# EAGLE board unoplus (EAGLE 9.6.2)
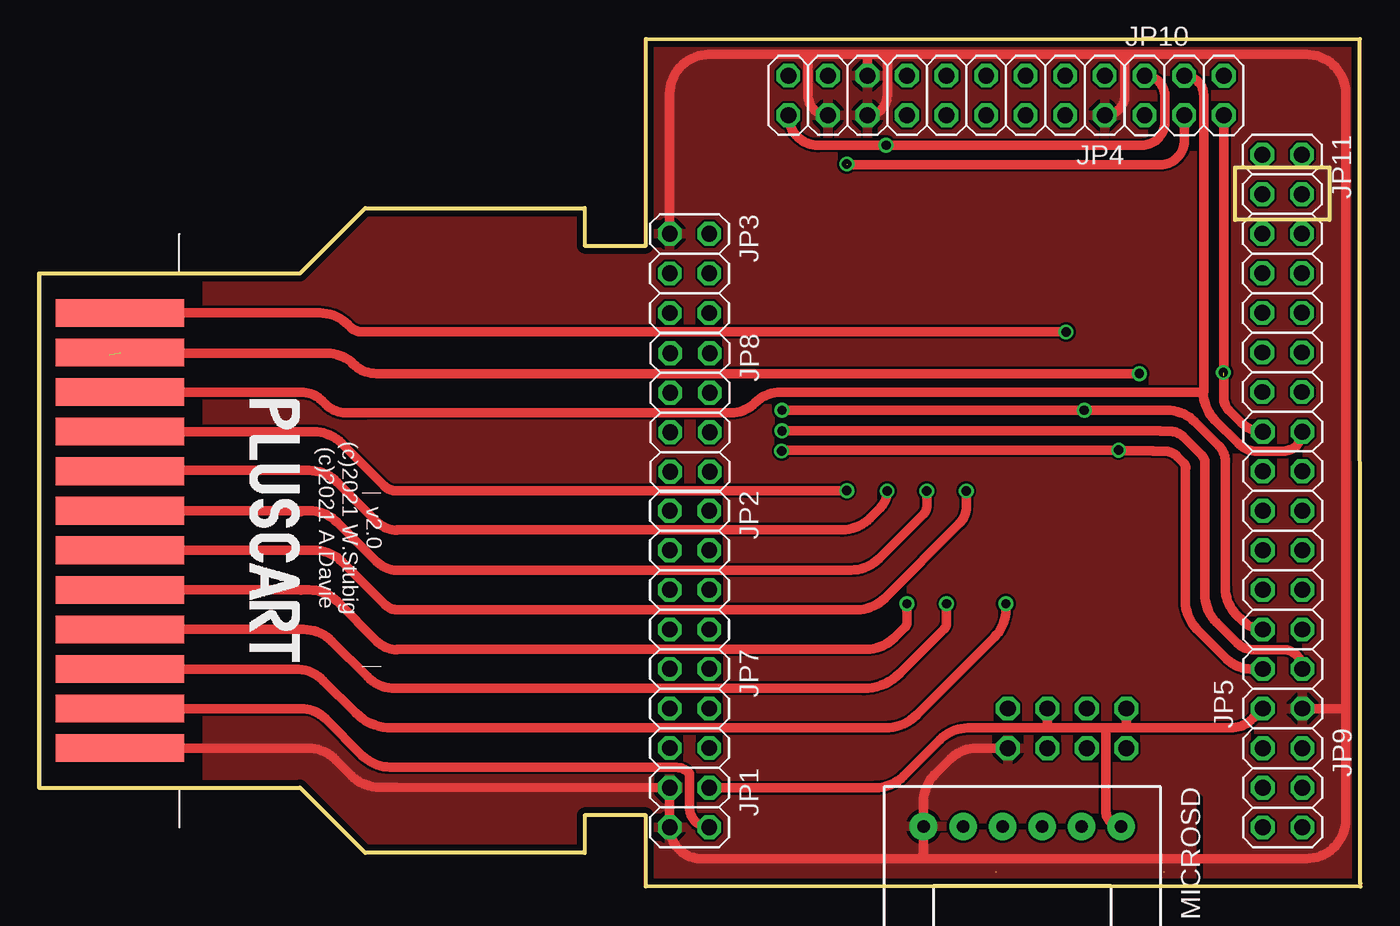
[diagram p0: board, top side]
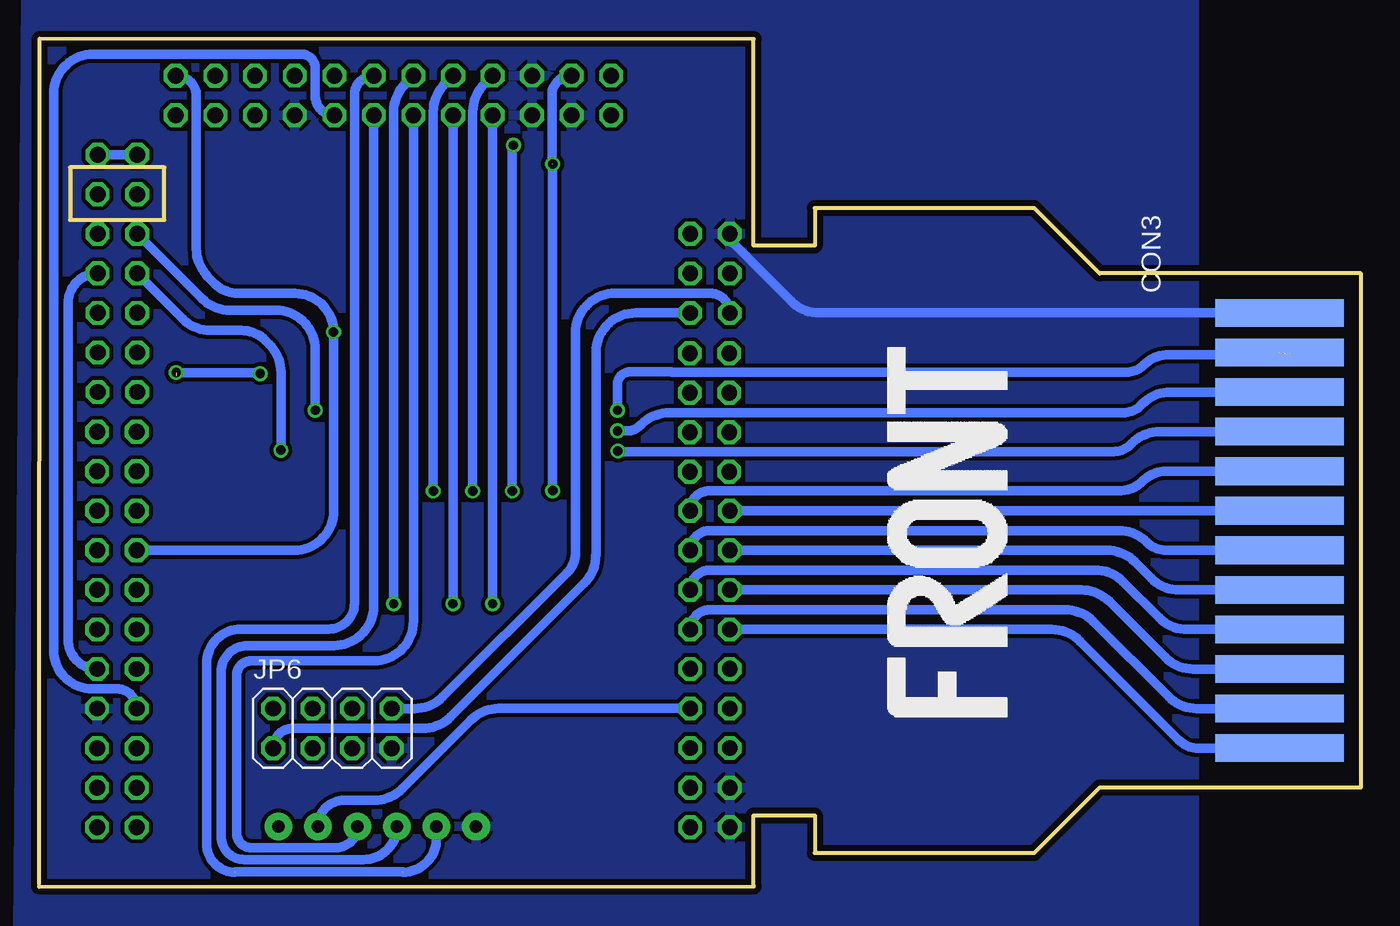
[diagram p1: board, bottom side, seen from below]

Size 84.89 x 54.42 mm. Coordinates in mm from the lower left corner, seen from the top.
Outline: 38.99,54.41 84.85,54.42
Outline: 38.99,41.15 35.05,41.15 35.05,43.56 20.95,43.56 16.76,39.37 0,39.37 0,6.35 16.76,6.35 20.95,2.16 35.05,2.16 35.05,4.57 38.99,4.57 38.99,0.01
Outline: 84.88,0.19 84.84,54.42
Outline: 38.98,41.15 38.98,54.41
Outline: 84.89,0 38.96,0.02
Copper layers (1*16): Top 0.0356mm / dielectric 1.5011mm / Bottom 0.0356mm
Design rules "OSHPark2layer": minimum track width 6mil, minimum drill 13mil, track to track 6mil, track to pad 6mil, pad to pad 6mil, via to via 6mil, smd to smd 6mil, copper to edge 15mil, drill to drill 6mil, minimum pad ring 7mil, minimum via ring 7mil, stop-mask expansion 3mil, vias tented up to drill 0mil, thermal gap 10mil
tRestrict: area 74.5,-0.8 to 74.5,5.7
Milling: 4 lines

## Footprints (pad centres in the part's own frame; a part is rotated, then mirrored left to right if it is on the bottom)
24PINEDGE-254MM = smd 1.778 x 8.255: 1-A -22.86,-7.62; 2-A -20.32,-7.62; 3-A -17.78,-7.62; 4-A -15.24,-7.62; 5-A -12.7,-7.62; 6-A -10.16,-7.62; 7-A -7.62,-7.62; 8-A -5.08,-7.62; 9-A -2.54,-7.62; 10-A 0,-7.62; 11-A 2.54,-7.62; 12-A 5.08,-7.62 | smd 1.778 x 8.255 bottom: 1-B -22.86,-7.62; 2-B -20.32,-7.62; 3-B -17.78,-7.62; 4-B -15.24,-7.62; 5-B -12.7,-7.62; 6-B -10.16,-7.62; 7-B -7.62,-7.62; 8-B -5.08,-7.62; 9-B -2.54,-7.62; 10-B 0,-7.62; 11-B 2.54,-7.62; 12-B 5.08,-7.62
2X02 = drill 1.016 octagon: 1 -1.27,-1.27; 2 -1.27,1.27; 3 1.27,-1.27; 4 1.27,1.27
2X04 = drill 1.016 octagon: 1 -3.81,-1.27; 2 -3.81,1.27; 3 -1.27,-1.27; 4 -1.27,1.27; 5 1.27,-1.27; 6 1.27,1.27; 7 3.81,-1.27; 8 3.81,1.27
2X03 = drill 1.016 octagon: 1 -2.54,-1.27; 2 -2.54,1.27; 3 0,-1.27; 4 0,1.27; 5 2.54,-1.27; 6 2.54,1.27
2X09 = drill 1.016 octagon: 1 -10.16,-1.27; 2 -10.16,1.27; 3 -7.62,-1.27; 4 -7.62,1.27; 5 -5.08,-1.27; 6 -5.08,1.27; 7 -2.54,-1.27; 8 -2.54,1.27; 9 0,-1.27; 10 0,1.27; 11 2.54,-1.27; 12 2.54,1.27; 13 5.08,-1.27; 14 5.08,1.27; 15 7.62,-1.27; 16 7.62,1.27; 17 10.16,-1.27; 18 10.16,1.27
2X08 = drill 1.016 octagon: 1 -8.89,-1.27; 2 -8.89,1.27; 3 -6.35,-1.27; 4 -6.35,1.27; 5 -3.81,-1.27; 6 -3.81,1.27; 7 -1.27,-1.27; 8 -1.27,1.27; 9 1.27,-1.27; 10 1.27,1.27; 11 3.81,-1.27; 12 3.81,1.27; 13 6.35,-1.27; 14 6.35,1.27; 15 8.89,-1.27; 16 8.89,1.27
2X07 = drill 1.016 octagon: 1 -7.62,-1.27; 2 -7.62,1.27; 3 -5.08,-1.27; 4 -5.08,1.27; 5 -2.54,-1.27; 6 -2.54,1.27; 7 0,-1.27; 8 0,1.27; 9 2.54,-1.27; 10 2.54,1.27; 11 5.08,-1.27; 12 5.08,1.27; 13 7.62,-1.27; 14 7.62,1.27
MICROSD_FOOTPRINT = drill 0.8 pad 1.778: 3V3 -13.97,6.35; CLK -13.97,-1.27; CS -13.97,3.81; GND -13.97,-6.35; MISO -13.97,-3.81; MOSI -13.97,1.27

## Placement (x,y rotation side)
CON3  A2600  [24PINEDGE-254MM]  12.83,31.75 90 bottom
JP1  0  [2X02]  41.78,5.08 270 top
JP2  0  [2X04]  41.78,20.32 270 top
JP3  0  [2X03]  41.78,39.37 270 top
JP4  0  [2X09]  58.29,50.8 180 top
JP5  0  [2X08]  79.88,20.32 90 top
JP6  0  [2X04]  66.04,10.16 0 bottom
JP7  0  [2X03]  41.78,11.44 270 top
JP8  0  [2X04]  41.82,30.44 270 top
JP9  0  [2X03]  79.88,6.34 270 top
JP10  0  [2X03]  73.56,50.79 0 top
JP11  0  [2X07]  79.85,39.37 270 top
MICROSD  MICROSD2MICROSD2  [MICROSD_FOOTPRINT]  63.16,-10.11 270 top

## Library data of the parts
CON3 = con-edge
JP1-JP11 = pinhead
MICROSD = MICROSD

## Nets
+3V3: JP1.2 JP4.4 JP5.2 JP6.2 JP6.6 MICROSD.3V3
A0: CON3.8-A JP2.2
A1: CON3.7-A JP2.1
A2: CON3.6-A JP2.4
A3: CON3.5-A JP2.3
A4: CON3.4-A JP2.6
A5: CON3.3-A JP2.5
A6: CON3.2-A JP2.8
A7: CON3.1-A JP2.7
A8: CON3.3-B JP4.7
A9: CON3.4-B JP4.10
A10: CON3.6-B JP4.9
A11: CON3.5-B JP4.12
A12: CON3.7-B JP4.11
CLK: JP4.6 MICROSD.CLK
CS: JP7.4 MICROSD.CS
D0: CON3.9-A JP5.4 JP11.7
D1: CON3.10-A JP5.3 JP11.8
D2: CON3.11-A JP5.6 JP11.5
D3: CON3.12-B JP5.10 JP10.6
D4: CON3.11-B JP5.16 JP10.5
D5: CON3.10-B JP5.15 JP10.4
D6: CON3.9-B JP4.15 JP10.3
D7: CON3.8-B JP4.18 JP10.2
GND: CON3.1-B CON3.12-A JP1.1 JP1.3 JP3.1 JP4.2 JP4.13 JP4.14 JP4.16 JP5.1 JP6.7 MICROSD.GND
MISO: JP4.5 MICROSD.MISO
MOSI: JP4.8 MICROSD.MOSI
SHORT: JP11.1 JP11.2
USART1_RX: JP3.5 JP6.8
USART1_TX: JP3.6 JP6.1
VCC: CON3.2-B JP1.4

## Tracks (layer width: path | path; a pad name or v marks a point on that pad's centre or on a via)
+3V3
  Top 0.61: JP1.2 53.74,6.35 arc45 55.52,7.09 57.87,9.44 arc-45 59.67,10.19 64.74,10.19 | MICROSD.3V3 arc-90 68.53,4.85 68.53,9.94 arc45 68.43,10.19 | 64.74,10.19 68.43,10.19 | 68.43,10.19 69.85,10.19 | 69.85,10.19 76.5,10.19 arc45 77.98,10.8 JP5.2 | JP6.2 69.85,10.19 | JP6.6 64.77,10.25 arc-45 64.74,10.19
  Bottom 0.61: JP5.2 arc-90 79.89,12.7 81.47,12.7 arc90 83.94,15.17 83.94,50.9 arc90 81.41,53.44 68.02,53.44 arc90 67.14,52.57 67.14,50.76 arc-90 JP4.4
A0
  Bottom 0.61: JP2.2 43.05,24.2 arc90 41.85,25.41 15.55,25.41 arc-45 13.97,26.06 arc45 12.5,26.67 CON3.8-A
A1
  Bottom 0.61: JP2.1 CON3.7-A
A2
  Bottom 0.61: JP2.4 arc90 41.78,22.86 15.53,22.86 arc45 13.73,22.12 arc-45 12.46,21.59 CON3.6-A
A3
  Bottom 0.61: JP2.3 16.29,21.59 arc45 14.5,20.85 13.44,19.79 arc-45 11.65,19.05 CON3.5-A
A4
  Bottom 0.61: JP2.6 arc90 41.78,20.32 17.05,20.32 arc45 15.26,19.58 12.94,17.25 arc-45 11.14,16.51 CON3.4-A
A5
  Bottom 0.61: JP2.5 17.94,19.05 arc45 16.15,18.31 12.55,14.71 arc-45 10.76,13.97 CON3.3-A
A6
  Bottom 0.61: JP2.8 arc90 41.78,17.78 18.98,17.78 arc45 17.19,17.04 12.33,12.17 arc-45 10.53,11.43 CON3.2-A
A7
  Bottom 0.61: JP2.7 19.82,16.51 arc45 18.03,15.77 11.66,9.4 arc-45 10.43,8.89 CON3.1-A
A8  (via drill 0.6)
  Top 0.61: CON3.3-B 16.47,13.97 arc-45 18.27,13.23 20.34,11.16 arc45 22.68,10.19 54.36,10.19 arc45 56.4,11.03 61.36,16 arc45 62.1,17.79 v62.1,18.16
  Bottom 0.61: JP4.7 61.36,51.54 arc-45 62.1,49.75 v62.1,18.16
A9  (via drill 0.6)
  Top 0.61: v58.29,18.16 58.29,16.92 arc-45 58.13,16.53 55.3,13.7 arc-45 52.96,12.73 22.99,12.72 22.9,12.72 arc-45 21.1,13.47 18.8,15.77 arc45 17.01,16.51 CON3.4-B
  Bottom 0.61: JP4.10 v58.29,18.16
A10  (via drill 0.6)
  Top 0.61: v59.56,25.4 59.56,24.36 arc-45 59.13,23.32 54.34,18.52 arc-45 52.54,17.78 22.99,17.78 arc-45 22.25,18.09 19.49,20.85 arc45 17.69,21.59 CON3.6-B
  Bottom 0.61: JP4.9 58.82,51.54 arc-45 59.56,49.75 v59.56,25.4
A11  (via drill 0.6)
  Top 0.61: v55.75,18.16 55.75,16.97 arc-45 55.63,16.66 54.95,15.98 arc-45 53.15,15.24 23.05,15.24 arc45 22.99,15.21 arc-45 21.73,15.74 19.16,18.31 arc45 17.36,19.05 16.78,19.05 | CON3.5-B 16.78,19.05 | 16.78,19.05 arc-45 16.84,19.03
  Bottom 0.61: JP4.12 v55.75,18.16
A12  (via drill 0.6)
  Top 0.61: v57.02,25.4 57.02,24.41 arc-45 56.83,23.93 53.96,21.06 arc-45 52.16,20.32 22.99,20.32 arc-45 21.69,20.86 19.16,23.39 arc45 17.36,24.13 16.79,24.13 | CON3.7-B 16.79,24.13 | 16.79,24.13 arc-90 16.84,24.08
  Bottom 0.61: JP4.11 56.28,51.54 arc-45 57.02,49.75 v57.02,25.4
CLK
  Bottom 0.61: JP4.6 arc-45 63.4,49.48 63.4,18.01 arc90 65.93,15.47 71.49,15.47 arc-90 73.18,13.78 73.18,3.22 arc-90 71.69,1.73 64.02,1.73 arc-90 MICROSD.CLK
CS
  Bottom 0.61: MICROSD.CS arc90 65.3,5.54 63.36,5.54 arc-45 61.56,6.28 57.15,10.7 arc45 55.35,11.44 JP7.4
D0  (via drill 0.6)
  Top 0.61: v47.7,27.96 47.76,28.03 v69.34,28.03 69.38,27.98 71.51,27.98 arc45 71.56,27.96 72.27,27.96 arc-45 73.13,27.61 73.52,27.22 arc-45 73.66,26.87 arc45 73.63,26.81 73.63,18.32 arc45 74.38,16.53 76.3,14.61 arc45 77.83,13.97 JP5.4
  Bottom 0.61: v47.7,27.96 47.67,27.93 15.84,27.93 arc-45 14.78,28.37 14.69,28.47 arc45 12.89,29.21 CON3.9-A | 69.32,28.05 arc-90 v69.34,28.03 69.34,33.01 arc-45 70.09,34.81 70.36,35.08 arc-45 71.89,35.71 73.86,35.71 arc45 75.66,36.46 JP11.7
D1  (via drill 0.6)
  Top 0.61: JP5.3 arc90 79.91,15.21 77.98,15.21 arc-45 76.98,15.63 75.62,16.98 arc-45 74.88,18.78 74.88,27.25 arc45 74.7,27.69 73.51,28.88 arc45 72.64,29.23 72.08,29.23 arc-45 72.02,29.26 v47.73,29.26
  Bottom 0.61: JP5.3 arc90 83,15.82 83,37.49 arc90 JP11.8 | CON3.10-A 12.21,31.75 arc-45 14,31.01 14.1,30.91 arc45 15.26,30.43 44.39,30.43 arc-45 46.19,29.68 46.25,29.62 arc45 47.11,29.26 v47.73,29.26
D2  (via drill 0.6)  (1 unrouted)
  Top 0.61: v47.73,30.58 v67.13,30.58 72.45,30.58 arc-45 74.25,29.84 75.79,28.3 arc-45 76.2,27.31 76.2,19.16 arc45 76.89,17.5 77.36,17.03 arc45 JP5.6
  Bottom 0.61: 4.52,34.16 12.29,34.16 arc-45 13.95,33.48 arc45 15.05,33.02 44.24,33.02 arc-90 44.26,33.05 46.94,33.05 arc-90 47.73,32.26 v47.73,30.58 | JP11.5 74.42,37.75 arc-45 72.62,37.01 69.67,37.01 arc90 67.13,34.47 v67.13,30.58
D3  (via drill 0.6)
  Top 0.61: v65.96,35.61 20.75,35.61 arc-45 20.01,35.92 19.84,36.09 arc45 18.05,36.83 CON3.12-B
  Bottom 0.61: JP5.10 68.49,21.59 arc-90 65.95,24.13 65.95,35.59 arc-45 v65.96,35.61 arc-90 68.44,38.08 72.1,38.08 arc45 73.56,38.69 74.03,39.16 arc45 74.78,40.96 74.78,50.74 arc-90 JP10.6
D4  (via drill 0.6)  (1 unrouted)
  Top 0.61: JP10.5 76.1,32.91 | 76.1,32.91 arc-45 76.07,32.85 76.07,32.8 | JP5.16 arc-45 77.22,29.79 76.43,30.58 arc-45 76.1,31.38 76.1,32.91 | 22.99,32.92 arc-45 23.03,32.94 | CON3.11-B arc45 5.33,34.24 18.54,34.24 arc-45 20.19,33.55 arc45 21.68,32.94 23.03,32.94 | v70.67,32.94 23.03,32.94
  Bottom 0.61: v70.67,32.94 arc-45 70.84,33.01 v76.07,33.01
D5
  Top 0.61: 5.55,31.89 arc45 CON3.10-B 16.84,31.75 arc-45 18.18,31.19 18.41,30.96 arc45 19.7,30.43 20.73,30.43 21.06,30.43 44.47,30.43 arc45 46,31.06 arc-45 47.66,31.75 74.79,31.75 | JP5.15 arc-90 79.9,27.95 78.23,27.95 arc-45 77.02,28.45 75.53,29.94 arc-45 74.79,31.74 74.79,31.75 | JP10.4 arc-90 74.8,50.82 74.8,31.76 arc-90 74.79,31.75
D6  (via drill 0.6)  (2 unrouted)
  Top 0.61: v51.89,25.43 45.47,25.43 45.44,25.4 22.99,25.4 arc-45 22.16,25.74 19.44,28.47 arc45 17.64,29.21 CON3.9-B | JP10.3 73.56,47.89 arc-90 72.02,46.35 51.93,46.35 arc-90 v51.89,46.39
  Bottom 0.61: JP4.15 arc-90 51.94,50.82 | 51.92,50.85 51.92,46.39 | v51.89,46.39 v51.89,25.43
D7  (via drill 0.6)
  Top 0.61: v54.48,25.4 arc-45 54.03,24.32 53.37,23.65 arc-45 51.59,22.91 23.05,22.91 arc45 22.99,22.89 arc-45 21.73,23.41 19.16,25.98 arc45 17.36,26.72 16.84,26.72 16.46,26.72 5.33,26.72 arc45 CON3.8-B | JP4.18 arc90 50.07,47.59 v54.41,47.59 70.84,47.59 arc90 72.3,49.06 72.3,50.78 arc90 JP10.2
  Bottom 0.61: v54.48,25.4 54.48,47.53 arc-90 v54.41,47.59
GND
  Top 0.61: JP6.7 60.22,8.89 arc45 58.54,8.19 57.56,7.22 arc45 56.82,5.42 MICROSD.GND 56.82,2.28 arc-45 56.62,1.79 | 83.94,11.52 83.94,4.33 arc-90 81.41,1.79 56.62,1.79 | JP5.1 83.85,11.43 arc90 83.94,11.52 | 83.94,11.52 83.94,50.89 arc90 81.41,53.43 69.75,53.43 | 69.75,53.43 54.48,53.43 | 54.48,53.43 53.26,53.43 | JP4.2 arc90 69.75,50.83 69.75,53.43 | JP3.1 40.51,50.89 arc-90 43.05,53.43 49.4,53.43 | 49.4,53.43 53.26,53.43 | JP4.13 53.21,53.38 arc-90 53.26,53.43 | JP4.16 arc-90 49.4,50.8 49.4,53.43 | JP4.14 arc90 54.48,50.8 54.48,53.43 | CON3.1-B 17.26,8.89 arc-45 19.06,8.15 20.08,7.12 arc45 21.88,6.38 22.99,6.38 JP1.1 JP1.3 arc90 42.53,1.79 56.62,1.79
  Bottom 0.61: CON3.12-A 31.98,36.83 34.76,36.83 arc45 36.56,37.57 40.24,41.26 arc45 JP3.1
  pour Bottom (isolate 0.254): 10.67,57.15 10.67,1.91 10.67,-3.05 78.99,-3.05 86.23,-3.05 85.72,57.15
  pour Top: 10.79,58.04 10.79,-4.19 86.36,-4.19 86.36,58.04
MISO  (2 unrouted)
  Bottom 0.61: JP4.5 arc-90 64.62,50.82 64.62,18.17 arc90 66.27,16.53 71.91,16.53 arc-90 74.11,14.33 74.11,2.74 arc-90 72.3,0.92 | MICROSD.MISO 59.36,3.07 arc90 61.51,0.92 | 61.51,0.95 72.3,0.95
MOSI
  Bottom 0.61: JP4.8 60.83,17.03 arc90 63.37,14.49 71.24,14.49 arc-90 72.19,13.54 72.19,3.44 arc-90 71.25,2.5 65.8,2.5 arc-90 MICROSD.MOSI
SHORT
  Bottom 0.61: JP11.1 JP11.2
USART1_RX
  Bottom 0.61: JP3.5 arc-90 41.78,38.1 47.88,38.1 arc-90 50.42,35.56 50.42,21.46 arc45 50.96,20.16 58.95,12.17 arc45 60.74,11.43 JP6.8
USART1_TX
  Bottom 0.61: JP6.1 arc90 68.58,10.16 60.23,10.16 arc-45 58.44,10.9 49.87,19.47 arc-45 49.12,21.27 arc-45 49.11,21.31 49.11,34.29 arc90 46.57,36.83 JP3.6
VCC
  Top 0.61: JP1.4 arc-90 41.78,5.08 arc45 41.78,5.08 41.78,7.28 arc45 40.85,7.67 22.99,7.67 22.57,7.67 arc-45 20.77,8.42 18.4,10.78 arc45 16.84,11.43 CON3.2-B

## Text on the board
tPlace: v2.0 / (c)2021 W.Stubig / (c)2021 A.Davie